# EAGLE board sonda4 (EAGLE 4.16)
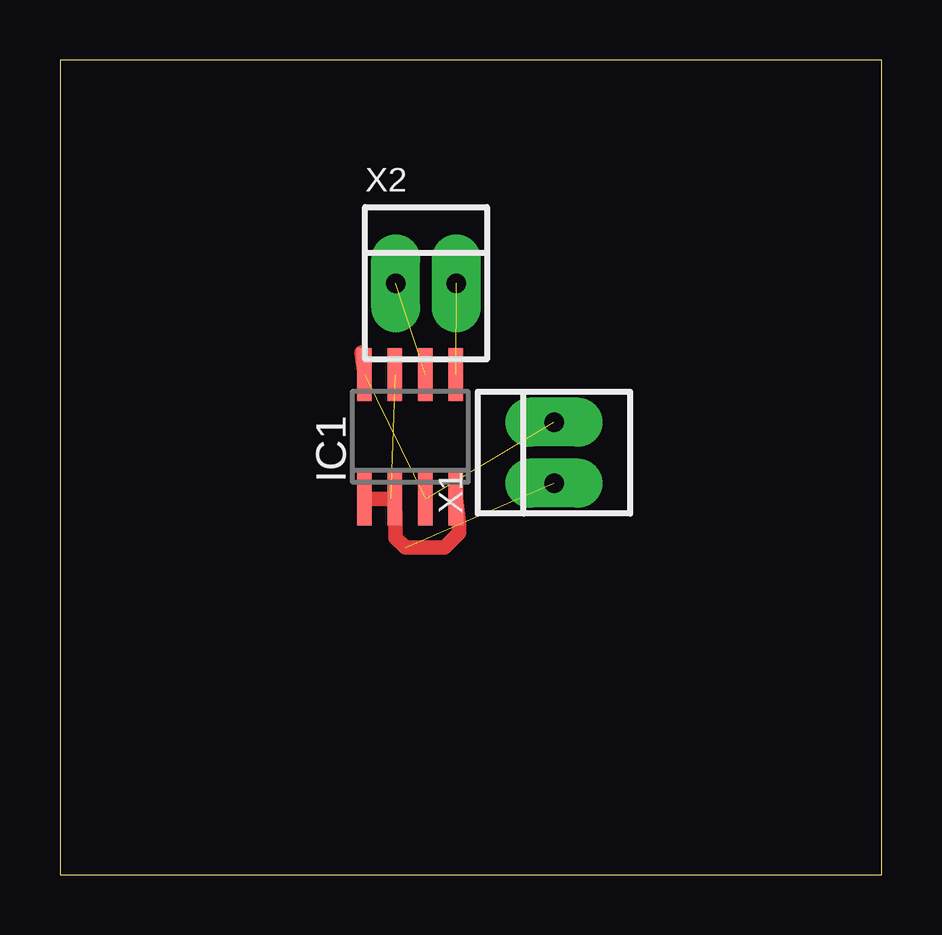
[diagram p0: board, top side]

Size 34.27 x 33.96 mm. Coordinates in mm from the lower left corner, seen from the top.
Outline: 0,0 34.27,0 34.27,33.96 0,33.96 0,0
Copper layers (1*16): Top 0.035mm / dielectric 1.5mm / Bottom 0.035mm
Design rules "mio2": minimum track width 24mil, minimum drill 24mil, track to track 24mil, track to pad 24mil, pad to pad 24mil, via to via 24mil, smd to smd 24mil, copper to edge 40mil, drill to drill 8mil, minimum pad ring 24mil, minimum via ring 24mil, stop-mask expansion 4mil, vias tented up to drill 0mil, thermal gap 10mil

## Footprints (pad centres in the part's own frame; a part is rotated, then mirrored left to right if it is on the bottom)
SO-08 = smd 0.6 x 2.2: 1 -1.905,-2.6; 2 -0.635,-2.6; 3 0.635,-2.6; 4 1.905,-2.6; 5 1.905,2.6; 6 0.635,2.6; 7 -0.635,2.6; 8 -1.905,2.6
22-23-2021 = drill 0.813 long: 1 -1.27,0; 2 1.27,0

## Placement (x,y rotation side)
IC1  24LC16BSN  [SO-08]  14.6,18.25 0 top
U$1  [A4P-LOC]  -71.76,-121.45 0 top  (outside the outline)
X1  22-23-2021  [22-23-2021]  20.59,17.59 90 top
X2  22-23-2021  [22-23-2021]  15.26,24.65 0 top

## Library data of the parts
IC1 = microchip
U$1 = frames
X1 X2 = con-molex

## Nets
GND: IC1.1 IC1.2 IC1.4 IC1.7 X1.1
N$1: IC1.6 X2.1
N$2: IC1.5 X2.2
VCC: IC1.3 IC1.8 X1.2

## Tracks (layer width: path | path; a pad name or v marks a point on that pad's centre or on a via)
GND  (2 unrouted)
  Top 0.61: IC1.1 12.97,15.66 13.79,15.66 IC1.2 13.99,14.64 13.99,14.03 14.4,13.63 16.02,13.63 16.63,14.24 16.63,14.64 IC1.4
N$1  (1 unrouted)
N$2  (1 unrouted)
VCC  (2 unrouted)
  Top 0.61: IC1.8 12.57,21.76

## Text on the board
Pads: www.pyacqua.net